# Altium PCB nRF53_Module.PcbDoc
Units mil, origin at the board's own origin, x right, y up, seen from the top; angles counter-clockwise.
Board outline 550 x 880 mil, 3 copper layers (Top Layer, Mid-Layer 3, Bottom Layer); 34 components, 74 nets, 222 pads, 55 vias.
Unrouted connection lines stored in the file: 48.
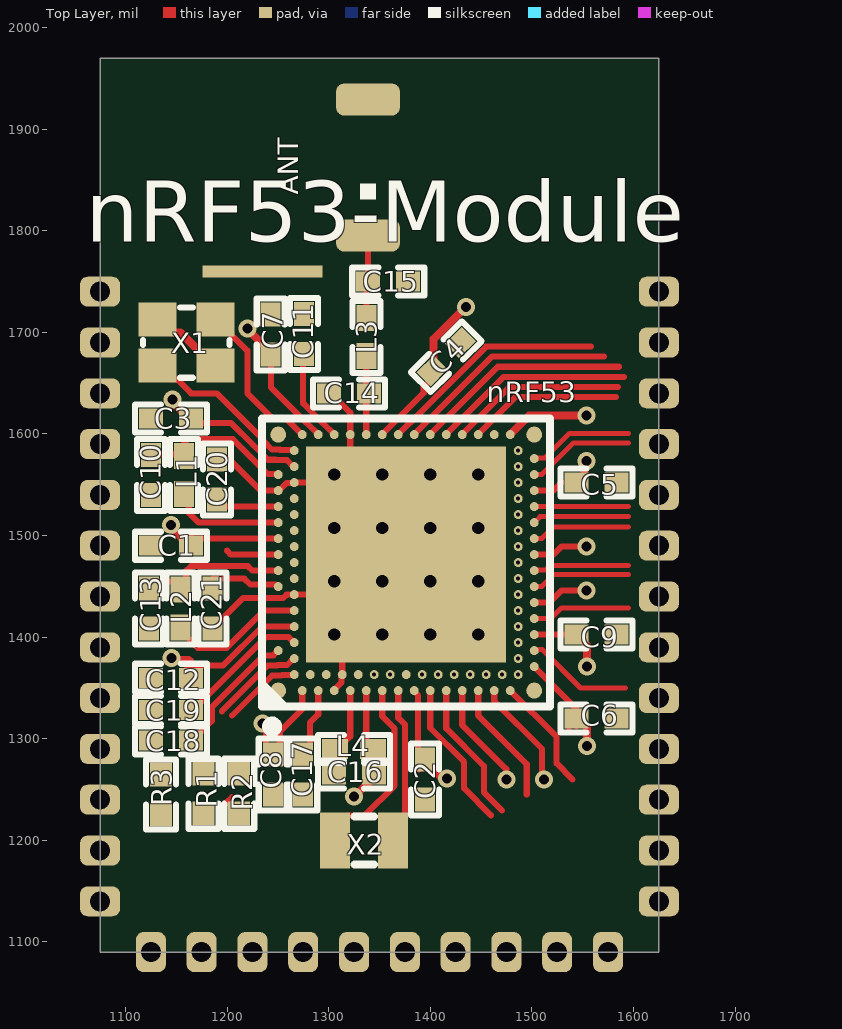
[diagram p0: Top Layer view]
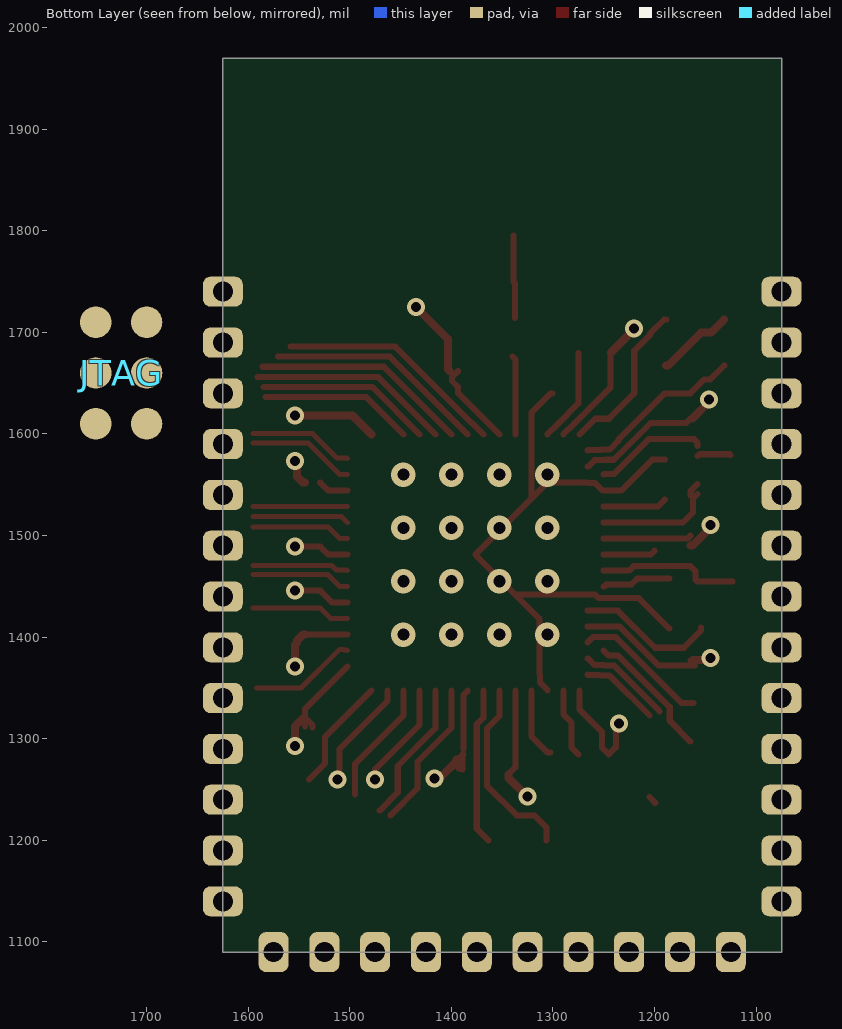
[diagram p1: Bottom Layer view, seen from below]
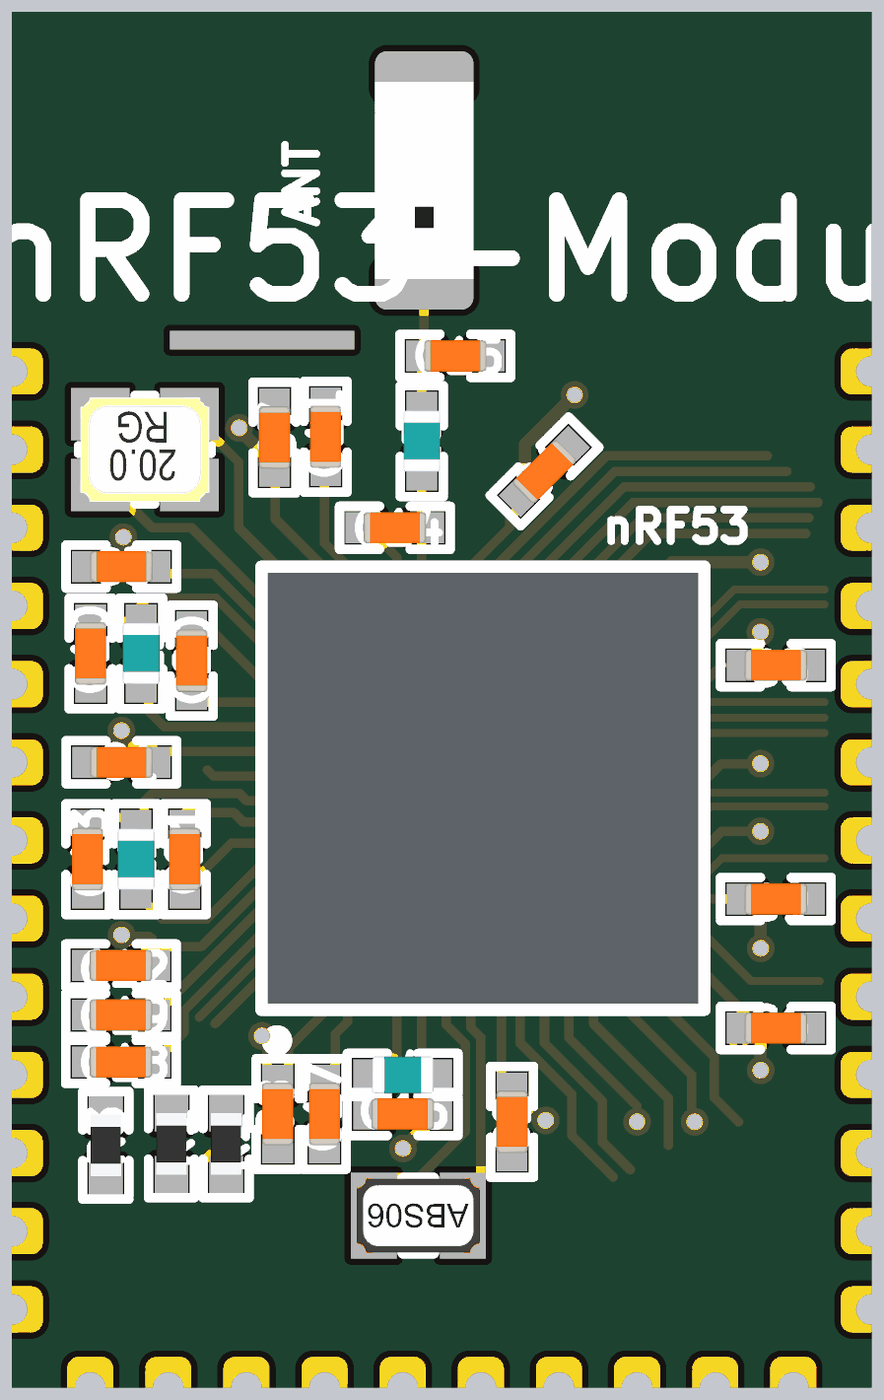
[diagram p2: 3D render of the assembled board from above, using the file's embedded part models]

## Layer stack, top to bottom
Top Solder: solder mask 0.4, Solder Resist, Dk 3.5
Top Layer: signal copper 1.4
Dielectric 1: dielectric 12.6, FR-4, Dk 4.8
Mid-Layer 3: signal copper 1.4
Dielectric2: dielectric 12.6, FR-4, Dk 4.8
Bottom Layer: signal copper 1.4
Bottom Solder: solder mask 0.4, Solder Resist, Dk 3.5

## Board outline
1075,1090 1625,1090 1625,1970 1075,1970

## Design rules (kind name [scope] priority, off if disabled: settings)
Clearance [All] p1: gap=3.94 ignorepadtopadclearanceinfootprint=TRUE
ComponentClearance [All] p1 off: gap=10 collisioncheckmode=3 verticalgap=10 showdistances=FALSE
DiffPairsRouting [InDifferentialPair('DiffPair')] p1: maxlimit=10 minlimit=3.5 mostfreqgap=7.87 toplayer_minwidth=3.5 toplayer_maxwidth=15 toplayer_prefwidth=5.91 midlayer3_minwidth=3.5 midlayer3_maxwidth=15 midlayer3_prefwidth=5.91 bottomlayer_minwidth=3.5 bottomlayer_maxwidth=15 bottomlayer_prefwidth=5.91 maxuncoupledlength=500
HoleSize [All] p1 off: absolutevalues=TRUE maxlimit=100 minlimit=1 maxpercent=80.000 minpercent=20.000
HoleToHoleClearance [All] p1 off: gap=11.81 allowstackedmicrovias=TRUE
MatchedLengths usb [InDifferentialPair('USB')] p1: tolerance=39.37 checknetsindiffpair=FALSE checkdiffpairvsdiffpair=TRUE checkxsignals=TRUE checkothers=TRUE
MinimumAnnularRing [IsVia] p1: minimumring=3
MinimumSolderMaskSliver [All] p1 off: minsoldermaskwidth=10
PlaneConnect [InNet('NetC11_2')] p1: planeconnectstyle=Direct reliefexpansion=20 reliefentries=4 reliefconductorwidth=10 reliefairgap=10
PolygonConnect [All] p1: thpad.connectstyle=Relief thpad.reliefconductorwidth=10 thpad.reliefentries=4 thpad.polygonreliefangle="90 Angle" thpad.airgapwidth=10 smdpad.connectstyle=Relief smdpad.reliefconductorwidth=10 smdpad.reliefentries=4 smdpad.polygonreliefangle="90 Angle" smdpad.airgapwidth=10 via.connectstyle=Direct via.reliefconductorwidth=10 via.reliefentries=4 via.polygonreliefangle="90 Angle" via.airgapwidth=10
PolygonConnect 3V3MCU [InNet('NetC11_2')] p2: connectstyle=Direct reliefconductorwidth=10 reliefentries=4 polygonreliefangle="90 Angle" airgapwidth=10
PolygonConnect VBUSMCU [InNet('NetC12_2')] p3: connectstyle=Direct reliefconductorwidth=10 reliefentries=4 polygonreliefangle="90 Angle" airgapwidth=10
PolygonConnect VUSB [InNet('VUSB')] p4: connectstyle=Direct reliefconductorwidth=0 reliefentries=4 polygonreliefangle="90 Angle" airgapwidth=0
PolygonConnect viagnd [InNet('GND')] p5: thpad.connectstyle=Relief thpad.reliefconductorwidth=10 thpad.reliefentries=4 thpad.polygonreliefangle="90 Angle" thpad.airgapwidth=10 smdpad.connectstyle=Relief smdpad.reliefconductorwidth=10 smdpad.reliefentries=4 smdpad.polygonreliefangle="90 Angle" smdpad.airgapwidth=10 via.connectstyle=Direct via.reliefconductorwidth=10 via.reliefentries=4 via.polygonreliefangle="90 Angle" via.airgapwidth=10
RoutingVias [All] p1: holewidth=7.87 width=15.75 viastyle="Through Hole" minholewidth=3.94 minwidth=7.87 maxholewidth=248.03 maxwidth=50
SilkToSilkClearance [All] p1 off: silktosilkclearance=10
SilkToSolderMaskClearance [IsPad] p1 off: minsilkscreentomaskgap=10 clearancetoexposedcopper=TRUE
SolderMaskExpansion [All] p1: expansion=4 istentingtop=FALSE
Width [All] p1: maxlimit=39.37 minlimit=3.2 preferedwidth=5.91
22 further rules are at their usual default settings.

## Components (designator, comment, footprint, x,y, rotation, side; value= is the part's Value field where it differs from the comment)
ANT "2450AT18D0100" AMCA31-2R450G-S1F-T3 1338.76,1795.28 r0 top
C1 "1uF" C0402 1145,1490 r0 top value=100pF
C2 "100nF" C0402 1395,1260 r90 top value=100pF
C3 "100nF" C0402 1144.99,1615.19 r0 top value=100pF
C4 "100nF" C0402 1415.75,1676.07 r225 top value=100pF
C5 "100nF" C0402 1563.82,1552.11 r180 top value=100pF
C6 "100nF" C0402 1563.82,1320 r180 top value=100pF
C7 "100nF" C0402 1242.99,1697.78 r270 top value=100pF
C8 "100nF" C0402 1245,1265 r90 top value=100pF
C9 "100nF" C0402 1563.82,1402.51 r180 top value=100pF
C10 "1uF" C0402 1125.31,1559.62 r90 top value=100pF
C11 "2.2nF" C0402 1275.66,1698.23 r270 top value=100pF
C12 "1uF" C0402 1144.68,1360 r0 top value=100pF
C13 "1uF" C0402 1123.22,1428.02 r90 top value=100pF
C14 "1.5pF" C0402 1320,1640 r0 top value=100pF
C15 "DNP" C0402 1358.66,1750 r180 top value=100pF
C16 "2.2uF" C0402 1325,1265 r0 top value=100pF
C17 "4.7uF" C0402 1275,1265 r90 top value=100pF
C18 "4.7uF" C0402 1144.68,1298.29 r0 top value=100pF
C19 "4.7uF" C0402 1144.68,1328.29 r0 top value=100pF
C20 "100nF" C0402 1190,1555 r270 top value=100pF
C21 "1uF" C0402 1185.51,1428.02 r90 top value=100pF
JTAG "DNP" "JTAG Pins 6" 1725,1710 r90 bottom value="Pin Header 2x5, 1.27mm"
L1 "10uH" IND0402 1157.59,1559.62 r270 top value=120R/0.55A
L2 "10uH" IND0402 1154.37,1428.01 r270 top value=120R/0.55A
L3 "3.9nH" IND0402 1337.22,1695.44 r270 top value=120R/0.55A
L4 "10uH" IND0402 1325,1290 r0 top value=120R/0.55A
nRF53 "nRF5340-QKAA" nRF5340 1376.38,1473.37 r90 top locked
nRF53-Module "DNP" nRF53Module 1075,1240 r0 top locked
R1 "22R" RES0402 1177,1245.89 r270 top value=0R
R2 "22R" RES0402 1212,1245.89 r270 top value=0R
R3 "4R7" RES0402 1135,1245 r270 top value=0R
X1 "32MHz" XTAL_2016 1160,1690 r180 top
X2 "32.768kHz" XTAL_2012 1335,1200 r180 top

## Footprints (in the part's own frame and the unit in brackets; to place one, negate y for a bottom-side part, rotate by r counter-clockwise, add the part's x,y. Pads: shape width x height; smd on the part's side, far side on the other; paste and mask are expansions set on the pad)
AMCA31-2R450G-S1F-T3 [mm] "Chip antenna 2.45Ghz"
  rrect50% 1.6x0.8 smd: 1(0,0) NC(0,3.4)
  silkscreen extent -0.2,0.9 0.2,1.3, body extent -0.8,0.1 0.8,3.3, height 1.4
C0402 [mm]
  rect 0.6x0.5 smd: 1(-0.5,0) 2(0.5,0)
  silkscreen extent -0.9,-0.35 0.9,0.35, body extent -0.51,-0.25 0.51,0.25, height 0.5
IND0402 [mm]
  rect 0.65x0.5 smd: 1(-0.475,0) 2(0.475,0)
  silkscreen extent -0.9,-0.35 0.9,0.35, body extent -0.5,-0.3 0.5,0.3, height 0.5
"JTAG Pins 6" [mil] "TC2030-ALT-NL"
  round 31 smd paste-196.85: 1(-100,-25) 2(-100,25) 3(-50,-25) 4(-50,25) 5(0,-25) 6(0,25)
  Top Layer pour cut-out: -100,25 -100,-25 0,-25 0,25
nRF53Module [mm] "Module"
  rrect50% 1x0.75 hole 0.5: 1(0,12.7) 2(0,11.43) 3(0,10.16) 4(0,8.89) 5(0,7.62) 6(0,6.35) 7(0,5.08) 8(0,3.81) 9(0,2.54) 10(0,1.27) 11(0,0) 12(0,-1.27) 13(0,-2.54) 14(13.97,-2.54) 15(13.97,-1.27) 16(13.97,0) 17(13.97,1.27) 18(13.97,2.54) 19(13.97,3.81) 20(13.97,5.08) 21(13.97,6.35) 22(13.97,7.62) 23(13.97,8.89) 24(13.97,10.16) 25(13.97,11.43) 26(13.97,12.7)
  rrect50% 0.75x1 hole 0.5: 27(1.27,-3.81) 28(2.54,-3.81) 29(3.81,-3.81) 30(5.08,-3.81) 31(6.35,-3.81) 32(7.62,-3.81) 33(8.89,-3.81) 34(10.16,-3.81) 35(11.43,-3.81) 36(12.7,-3.81)
nRF5340 [mm] "Nordic Semiconductor"
  rect 5.4x5 smd paste-5 mask+0.05: 104(0.2,0)
  round 0.4 smd paste+0.012 mask+0.05: A1(-3.2,3.2) A31(3.2,3.2) AL1(-3.2,-3.2) AL31(3.2,-3.2)
  round 0.225 smd paste+0.012 mask+0.05: A5(-2.2,3.2) A13(-0.6,3.2) A15(-0.2,3.2) A17(0.2,3.2) A19(0.6,3.2) A21(1,3.2) A23(1.4,3.2) A25(1.8,3.2) A27(2.2,3.2) AA1(-3.2,-1) AA31(3.2,-1) AB2(-2.8,-1.2) AC1(-3.2,-1.4) AC31(3.2,-1.4) AD2(-2.8,-1.6) AE1(-3.2,-1.8) AE31(3.2,-1.8) AF2(-2.8,-2) AG1(-3.2,-2.2) AG31(3.2,-2.2) AH2(-2.8,-2.4) AJ1(-3.2,-2.6) AJ31(3.2,-2.6) AK2(-2.8,-2.8) AK4(-2.4,-2.8) AK6(-2,-2.8) AK8(-1.6,-2.8) AK10(-1.2,-2.8) AK12(-0.8,-2.8) AK14(-0.4,-2.8) AK16(0,-2.8) AK18(0.4,-2.8) AK20(0.8,-2.8) AK22(1.2,-2.8) AK24(1.6,-2.8) AK26(2,-2.8) AK28(2.4,-2.8) AK30(2.8,-2.8) AL3(-2.6,-3.2) AL5(-2.2,-3.2) AL7(-1.8,-3.2) AL9(-1.4,-3.2) AL11(-1,-3.2) AL13(-0.6,-3.2) AL15(-0.2,-3.2) AL17(0.2,-3.2) AL19(0.6,-3.2) AL21(1,-3.2) AL23(1.4,-3.2) AL25(1.8,-3.2) AL27(2.2,-3.2) AL29(2.6,-3.2) B2(-2.8,2.8) B4(-2.4,2.8) B6(-2,2.8) B8(-1.6,2.8) B10(-1.2,2.8) B12(-0.8,2.8) B14(-0.4,2.8) B16(0,2.8) B18(0.4,2.8) B20(0.8,2.8) B22(1.2,2.8) B24(1.6,2.8) B26(2,2.8) B28(2.4,2.8) B30(2.8,2.8) C1(-3.2,2.6) C31(3.2,2.6) D2(-2.8,2.4) E1(-3.2,2.2) E31(3.2,2.2) F2(-2.8,2) G1(-3.2,1.8) G31(3.2,1.8) H2(-2.8,1.6) J1(-3.2,1.4) J31(3.2,1.4) K2(-2.8,1.2) L1(-3.2,1) L31(3.2,1) M2(-2.8,0.8) N1(-3.2,0.6) N31(3.2,0.6) P2(-2.8,0.4) R1(-3.2,0.2) R31(3.2,0.2) T2(-2.8,0) U1(-3.2,-0.2) U31(3.2,-0.2) V2(-2.8,-0.4) W1(-3.2,-0.6) W31(3.2,-0.6) Y2(-2.8,-0.8)
  rrect50% 1.1x1 on Top Paste: ""(-1.75,-1.8) ""(-1.75,-0.6) ""(-1.75,0.6) ""(-1.75,1.8) ""(-0.45,1.8) ""(-0.45,-0.6) ""(-0.45,0.6) ""(-0.45,-1.8) ""(0.85,1.8) ""(0.85,-0.6) ""(0.85,0.6) ""(0.85,-1.8) ""(2.15,-1.8) ""(2.15,-0.6) ""(2.15,0.6) ""(2.15,1.8)
  silkscreen extent -4.22,-3.6 3.6,3.6, body extent -3.5,-3.5 3.5,3.5, height 0.85
RES0402 [mm]
  rect 0.6x0.55 smd: 1(-0.5,0) 2(0.5,0)
  silkscreen extent -0.87,-0.38 0.88,0.38, body extent -0.5,-0.25 0.5,0.25, height 0.3
XTAL_2012 [mm]
  rect 0.75x1.4 smd: 1(-0.725,0) 2(0.725,0)
  silkscreen extent -0.24,-0.6 0.24,0.6, body extent -1,-0.61 1,0.61, height 0.6
XTAL_2016 [mm]
  rect 0.95x0.85 smd: 1(-0.725,-0.575) 2(0.725,-0.575) 3(0.725,0.575) 4(-0.725,0.575)
  silkscreen extent -1.08,-0.88 1.08,0.88, body extent -1.05,-0.85 1.05,0.85, height 0.56

## Part data
ANT: "2.45 GHz chip antenna", Manufacturer="Johanson Technology", Part Number="Johanson 2450AT18D0100_STD-L", Part number IPS=N.A., Supplier Part Number 1=2450AT18D0100E, Artikkelnr Noca=53059035, ComponentLink1Description=Datasheet, ComponentLink2Description="Supplier link", Footprint Doc=2450AT18D0100, HelpURL=http://www.johansontechnology.com/datasheets/antennas/2450AT18D0100.pdf, LatestRevisionDate=2016-06-02, Manufacturer Part Number=2450AT18D0100, Pin Count=4, Published=2016-01-12, Publisher="Nordic Semiconductor", Supplier 1=Digi-Key, Supplier 2=Mouser, Supplier Part Number 2=609-2450AT18D0100E
C1 C2 C3 C4 C5 C6 C7 C8 C9 C10 C11 C12 C13 C14 C15 C16 C17 C18 C19 C20 C21: library part CAP, "Capacitor", Published=8-Jun-2000, Publisher="Altium Limited", Revision="July-2002: Re-released for DXP Platform."
JTAG: "Pin Header 2x5, 1.27mm (50mil), SMD, Keying Shroud", Manufacturer=W-CON, Manufacturer Part Number=3132-10MS0BK00R1, Part Number="Pin Header 2x5 SMD, 1.27mm, KS", Part number IPS=N.A., Artikkelnr Noca=55010009, ComponentLink1Description=Datasheet, ComponentLink2Description="Supplier link", Footprint Doc=HDR_2x5-SMD-1.27mm, HelpURL=\\hizz\pro\app9717\Datasheet\connectores\W-CON\3132-XXMXXBK00XX.pdf, LatestRevisionDate=2016-04-21, Pin Count=10, Published=2016-01-22, Publisher="Nordic Semiconductor", Supplier 1=Cabcon, Supplier 2=Samtec, Supplier Part Number 1=3132-10MS0BK00R1, Supplier Part Number 2=FTSH-105-01-F-DV-K
L1 L2 L3 L4: "Inductor", Manufacturer=Murata, Manufacturer Part Number=BLM15AG121SN1D, Part Number=FB0402-120R@100M-500mA, Part number IPS=N.A., Artikkelnr Noca=33029317, ComponentLink1Description=Datasheet, ComponentLink2Description="Supplier link", Footprint Doc=0402, HelpURL=http://search.murata.co.jp/Ceramy/image/img/PDF/ENG/L0110S0100BLM15A_SN.pdf, LatestRevisionDate=2014-01-10, Note="Chip EMIFIL Inductor Type Chip Ferrite Bead", Pin Count=2, Published=2011-11-14, Publisher="Nordic Semiconductor"
nRF53: "Multi-protocol Bluetooth Low Energy, IEEE 802.15.4, ANT and 2.4GHz proprietary system-on-chip", Manufacturer="Nordic Semiconductor", Part Number=nRF5340-QKAADA, Part number IPS=N.A., Artikkelnr Noca=N.A., ComponentLink1Description=Datasheet, ComponentLink2Description="Supplier link", Footprint Doc=AQFN-98, LatestRevisionDate=2019-03-28, Pin Count=98, Published=2017-01-09, Publisher="Nordic Semiconductor", Supplier 1="Nordic Semiconductor", Supplier Part Number 1=nRF5340-QKAADA
nRF53-Module: library part nRF53-Module
R1 R2 R3: "Resistor, ±5%, 0.05W", Part Number=R0201-0R, Part number IPS=00000003245, Artikkelnr Noca=N.A., ComponentLink1Description=Datasheet, ComponentLink2Description="Supplier link", Footprint Doc=0201, LatestRevisionDate=2017-11-09, Note="Chip Res 5%", Pin Count=2, Published=2014-11-13, Publisher="Nordic Semiconductor"
X1: "XTAL SMD 2016, 32MHz, Cl=8pF, Total Tol: ±40ppm", Part Number=XTAL_SMD2016_32MHz_8pF_General, Footprint Doc=XTAL_2016, LatestRevisionDate=2016-08-19, Pin Count=4, Published=2016-08-19, Publisher="Nordic Semiconductor"
X2: "XTAL SMD 32.768kHz, 9pF, ±20ppm", Manufacturer=NDK, Manufacturer Part Number=NX3215SA-32.768K-STD-MUA-9, Part Number=XTAL_SMD3215_32.768kHz_9pF_NDK, Part number IPS=N.A., Supplier Part Number 1=535-11937-6-ND, Artikkelnr Noca=22010049, ComponentLink1Description=Datasheet, ComponentLink2Description="Supplier link", Footprint Doc=XTAL_3215, LatestRevisionDate=2017-10-23, Note="XTAL SMD 32.768kHz", Pin Count=2, Published=2017-10-23, Publisher="Nordic Semiconductor", Supplier 1=Digi-Key

## Free pads (board coordinates)
  rect 118.11x11.81 smd: 1(1235,1760)

## Via types
v1: diameter 7.87, hole 3.94, Top Layer to Mid-Layer 3, tented both sides, 23 vias
v2: diameter 17.72, hole 9.84, Top Layer to Bottom Layer, tented both sides, 16 vias
v3: diameter 24, hole 12, Top Layer to Bottom Layer, tented both sides, 16 vias

## Nets (pads, with @x,y where several pads share a name; then routed paths per layer and width w, separated by ;. In a path a pad name is that pad's centre, name@x,y a point inside that pad or via, vN(x,y) a via of type N, cw(c..) or ccw(c..) an arc to the next point about the centre after c; other vN are vias at no path point)
ADP_RST: nRF53.AK28
  other v1: 1486.61,1567.86
BUSY: nRF53.M2
  other v1: 1344.88,1363.14
D/C: nRF53.V2
  other v1: 1392.13,1363.14
D_RST: nRF53.P2
  other v1: 1360.63,1363.14
E_CS: nRF53.Y2
  other v1: 1407.87,1363.14
EPROM_CS: nRF53.AK14
  other v1: 1486.61,1457.62
GND: C1.1 C2.1 C3.1 C4.1 C5.1 C6.1 C7.1 C8.1 C9.1 C10.1 C11.1 C12.1 C13.1 C14.1 C15.1 C16.1 C17.1 C18.1 C19.1 C20.1 C21.1 JTAG.3 nRF53-Module.30 nRF53.104 nRF53.A25 nRF53.B12 nRF53.B26 nRF53.G1 nRF53.H2 nRF53.J31 X1.2 X1.4 | length 749.5
  Top Layer w6: C21.1 1215.56,1438.38 1255.1,1438.38 1258.59,1441.88 nRF53.B12 nRF53.104@1337.01,1441.88 ; C20.1 1202.52,1574.68 1232.96,1544.24 nRF53.A25 1251.17,1544.24 1258.49,1551.57 1265.59,1551.57 nRF53.B26 1305.51,1552.11 nRF53.104@1321.26,1536.36 ; C14.1 1302.28,1640 1321.26,1621.02 nRF53.J31 nRF53.104@1321.26,1536.36 ; nRF53.G1 1305.51,1348.16 1312.84,1355.49 1312.84,1362.59 nRF53.H2 1313.39,1418.25 nRF53.104@1337.01,1441.88 ; nRF53.104@1321.26,1536.36 nRF53.104 nRF53.104@1337.01,1441.88
  Top Layer w7.87: X1.2 1144.25,1699.84 1154.09,1699.84 1186.57,1667.36 X1.4
  other v3: 1305.51,1402.51 1352.76,1402.51 1400,1402.51 1447.24,1402.51 1305.51,1455 1352.76,1455 1400,1455 1447.24,1455 1305.51,1507.49 1352.76,1507.49 1400,1507.49 1447.24,1507.49 1305.51,1559.99 1352.76,1559.99 1400,1559.99 1447.24,1559.99
INT2: nRF53.AK30
  other v1: 1486.61,1583.61
IPS_BACKLIGHT: nRF53.W1 | length 147.4
  Top Layer w6: nRF53.W1 1400,1310.58 1433.36,1277.22 1433.36,1251.09 1459.72,1224.72
IPS_CS: nRF53.AD2
  other v1: 1439.37,1363.14
LRCLK: nRF53.R31 | length 226
  Top Layer w6: nRF53.R31 1368.5,1599.68 1379.54,1610.72 1379.87,1610.72 1455.16,1686.01 1558.39,1686.01
Motor: nRF53.AA1 | length 140.8
  Top Layer w6: nRF53.AA1 1415.75,1310.2 1452.77,1273.18 1452.77,1247.23 1470.69,1229.31
NetANT_1: ANT.1 C15.2 L3.1 | length 81.9
  Top Layer w6: L3.1 1337.22,1748.25 C15.2 1338.76,1750.21 ANT.1
NetC10_2: C10.2 L1.1 nRF53.A27 | length 145.1
  Top Layer w6: C10.2 1126.01,1580 1155.91,1580 L1.1 ; L1.1@1157.59,1588.32 1157.59,1591.27 1161.32,1595 1205.7,1595 1240.16,1560.53 1249.85,1560.53 nRF53.A27
NetC11_2: C11.2 nRF53.G31 | length 93.1
  Top Layer w6: C11.2@1274.92,1679.71 1274.92,1630.19 1294.39,1610.72 1294.47,1610.72 1305.51,1599.68 nRF53.G31
NetC13_2: C13.2 L2.1 nRF53.A15 | length 140.3
  Top Layer w6: C13.2@1123.22,1454.61 1157.67,1454.61 1159.58,1456.51 1159.58,1464.87 1164.7,1470 1220.57,1470 1225.07,1465.5 nRF53.A15
NetC14_2: C14.2 L3.2 nRF53.L31 | length 78.2
  Top Layer w6: nRF53.L31 1337.01,1640 1337.01,1673.31 L3.2@1340,1676.3
NetC17_2: C17.2 nRF53.E1 | length 68.8
  Top Layer w6: C17.2 1281.84,1291.53 1281.84,1316.1 1289.76,1324.02 nRF53.E1
NetC18_2: C18.2 nRF53.A5 R3.1 | length 130.8
  Top Layer w6: C18.2@1164.68,1297.15 1185.06,1317.52 1185.06,1331.11 1236.03,1382.07 1245.45,1382.07 1250.13,1386.76 nRF53.A5
NetC19_2: C19.2 nRF53.B6 | length 133.5
  Top Layer w6: C19.2@1161.81,1335.14 1173.24,1335.14 1238.19,1400.09 1260.69,1400.09 nRF53.B6
NetC20_2: C20.2 nRF53.A23 | length 63.2
  Top Layer w6: C20.2 1196.82,1528.49 nRF53.A23
NetC21_2: C21.2 nRF53.A13 | length 68.2
  Top Layer w6: C21.2@1185.51,1457.7 1217.01,1457.7 1222.9,1451.81 1247.56,1451.81 1249.62,1449.75 nRF53.A13
NetL1_2: L1.2 nRF53.A21 | length 126.9
  Top Layer w6: L1.2 1162.36,1536.15 1162.36,1522.64 1172.26,1512.74 nRF53.A21 ; L1.2@1157.59,1550.92 1164.44,1544.07 L1.2@1164.44,1539.22
NetL2_2: L2.2 nRF53.B10 | length 136.8
  Top Layer w6: L2.2 1154.37,1406.36 1171.14,1389.59 1199.59,1389.59 1236.13,1426.13 nRF53.B10
NetL4_1: L4.1 nRF53.J1 | length 70.2
  Top Layer w6: L4.1@1302.56,1286.65 1305.51,1286.65 1321.26,1302.4 nRF53.J1
NetnRF53_B2: nRF53.B2 R2.1 | length 85.9
  Top Layer w6: 1199.3,1236.91 1204.94,1242.55 ; 1204.94,1322.88 1244.26,1362.2 1253.68,1362.2 1254.07,1362.59 1265.59,1362.59 nRF53.B2
NetnRF53_B4: nRF53.B4 R1.1 | length 92.6
  Top Layer w6: 1195,1326.99 1240.14,1372.14 1249.57,1372.14 1249.96,1372.53 1259.01,1372.53 1265.37,1378.88 nRF53.B4
NetnRF53_B30: nRF53.B30 X1.3 | length 170.1
  Top Layer w6: X1.3 1145.19,1653.63 1151.11,1653.63 1164.74,1640 1190,1640 1235.58,1594.42 1235.58,1593.22 1244.26,1584.55 1251.92,1584.55 1252.31,1584.16 1265.59,1584.16 nRF53.B30
NetnRF53_C31: nRF53.C31 X1.1 | length 157.7
  Top Layer w6: X1.1 1190.51,1712.64 1204.24,1698.91 1204.24,1697.69 1220,1681.93 1220,1640 1245,1615 1258.37,1615 nRF53.C31
NetnRF53_N1: nRF53.N1 X2.2 | length 187
  Top Layer w6: X2.2 1306.46,1212.8 1318.22,1224.56 1335.71,1224.56 1365,1253.85 1365,1310 1352.76,1322.24 nRF53.N1
NetnRF53_R1: nRF53.R1 X2.1 | length 154.8
  Top Layer w6: X2.1 1375,1211.46 1375,1314.05 1368.5,1320.55 nRF53.R1
P0.08: nRF53.AH2
  other v1: 1470.87,1363.14
P0.09: nRF53.AJ1 | length 112.8
  Top Layer w6: nRF53.AJ1 1524.32,1301.81 1524.32,1275.68 1540,1260
P0.10: nRF53.AK2
  other v1: 1486.61,1363.14
P0.12: nRF53.AK6
  other v1: 1486.61,1394.63
P0.19: nRF53.AL13 | length 97.5
  Top Layer w5: nRF53.AL13 1509.79,1449.75 1521.64,1461.6 1595,1461.6
P0.20: nRF53.AK16
  other v1: 1486.61,1473.37
P0.21: nRF53.AL15 | length 94.7
  Top Layer w5: nRF53.AL15 1503.1,1466.24 1513.64,1466.24 1517.94,1470.54 1595,1470.54
P0.22: nRF53.AK18
  other v1: 1486.61,1489.12
P0.23: nRF53.AK20
  other v1: 1486.61,1504.87
P0.24: nRF53.AL27 | length 105.5
  Top Layer w5: nRF53.AL27 1509.79,1559.99 1540.82,1591.01 1595,1591.01
P0.26: nRF53.AL29 | length 102.2
  Top Layer w5: nRF53.AL29 1502.91,1576.28 1512.03,1576.28 ; 1512.7,1576.24 1536.91,1600.45 1595,1600.45
P0.30: nRF53.B24
P0.31: nRF53.B22
P1.04: nRF53.AL19 | length 97.5
  Top Layer w5: nRF53.AL19 1509.79,1496.99 1521.41,1508.62 1595,1508.62
P1.05: nRF53.AK22
  other v1: 1486.61,1520.62
P1.06: nRF53.AL21 | length 95
  Top Layer w5: nRF53.AL21 1508.17,1518.55 1595,1518.55
P1.07: nRF53.AK24
  other v1: 1486.61,1536.36
P1.08: nRF53.AL23 | length 92.6
  Top Layer w5: nRF53.AL23 1595,1528.49
P1.09: nRF53.AK26
  other v1: 1486.61,1552.11
P1.11: nRF53.B20
P1.12: nRF53.B18
P1.13: nRF53.A17 | length 51.9
  Top Layer w6: 1200,1485 1203.75,1481.25 nRF53.A17
P1.14: nRF53.B16
P1.15: nRF53.B14
QSPI_DATA0: nRF53.AL5 | length 105.9
  Top Layer w5: nRF53.AL5 1503.1,1387.5 1505.83,1387.5 1506.37,1388.04 1509.9,1388.04 1547.94,1350 1591.95,1350
QSPI_DATA1: nRF53.AK8
  other v1: 1486.61,1410.38
QSPI_DATA2: nRF53.AK10
  other v1: 1486.61,1426.13
QSPI_DATA3: nRF53.AL9 | length 96.9
  Top Layer w5: nRF53.AL9 1518.7,1418.25 1529.03,1428.59 1595,1428.59
QSPI_SCK: nRF53.AK12
  other v1: 1486.61,1441.88
RESET: JTAG.5 nRF53.AC31 | length 173.1
  Top Layer w6: nRF53.AC31 1431.5,1599.68 1478.08,1646.26 1585,1646.26
SCK: nRF53.U31 | length 218.5
  Top Layer w6: nRF53.U31 1384.25,1599.68 1460.64,1676.07 1570.79,1676.07
SCL: nRF53.AF2
  other v1: 1455.12,1363.14
SCLK: nRF53.AB2
  other v1: 1423.62,1363.14
SDA: nRF53.AE1 | length 122.2
  Top Layer w5.98: nRF53.AE1 1447.24,1322.76 1495,1275 1495,1245
SDOUT: nRF53.AE31 | length 151.2
  Top Layer w6: nRF53.AE31 1447.24,1599.68 1483.89,1636.33 1582.96,1636.33
SWDCLK: JTAG.4 nRF53.W31 | length 213.6
  Top Layer w6: nRF53.W31 1400,1599.68 1466.45,1666.14 1585.76,1666.14
SWDIO: JTAG.2 nRF53.AA31 | length 198.7
  Top Layer w6: nRF53.AA31 1415.75,1599.68 1472.26,1656.2 1590.74,1656.2
SWO: JTAG.6 nRF53.AK4
  other v1: 1486.61,1378.88
USB_N: nRF53-Module.28 R1.2
USB_P: nRF53-Module.29 R2.2
VBAT: R3.2
VDD_nRF: C1.2 C2.2 C3.2 C4.2 C5.2 C6.2 C7.2 C8.2 C9.2 C12.2 C16.2 JTAG.1 L4.2 nRF53.A19 nRF53.AC1 nRF53.AG1 nRF53.AJ31 nRF53.AL3 nRF53.AL7 nRF53.AL11 nRF53.AL17 nRF53.AL25 nRF53.B8 nRF53.B28 nRF53.C1 nRF53.E31 nRF53.L1 nRF53.N31 nRF53.U1 | length 1697.6
  Top Layer w6: 1160.08,1372.16 1196.22,1372.16 1234.43,1410.38 nRF53.B8 ; 1162.7,1377.22 1164.67,1377.22 ; C1.2@1164.67,1499.78 1167.45,1496.99 nRF53.A19 ; C3.2 1169.14,1610.72 1204.03,1610.72 1225.65,1589.11 1240.14,1574.61 1247.8,1574.61 1248.19,1574.22 1259.01,1574.22 1265.37,1567.86 nRF53.B28 ; v2(1235,1315) 1235,1311.83 1238.16,1308.67 1238.16,1291.53 C8.2 1251.84,1291.53 1251.84,1306.84 1274.02,1329.02 nRF53.C1 ; C7.2 C7.2@1242.99,1680.07 ; C7.2@1243.43,1678.1 1243.43,1645.7 1278.4,1610.72 1278.72,1610.72 1289.76,1599.68 nRF53.E31 ; nRF53.L1 1337.01,1271.84 1343.85,1265 C16.2 ; nRF53.N31 1352.76,1599.68 1393.58,1640.5 1393.58,1646.33 1399.39,1652.14 1399.39,1655.91 C4.2@1393.58,1661.72 ; nRF53.U1 1384.25,1346.62 1388.16,1342.71 C2.2@1388.16,1289.56 ; C2.2@1388.16,1284.56 C2.2@1395,1277.72 ; C2.2@1389.02,1269.67 C2.2@1389.02,1284.56 ; C2.2@1389.02,1274.67 C2.2@1392.74,1270.94 ; nRF53.AC1 1431.5,1313.5 1475,1270 ; nRF53.AG1 1462.99,1337.01 1510,1290 1510,1261.85 v2(1511.85,1260) ; nRF53.AL3 1544.13,1329.24 C6.2 C6.2@1544.13,1311.99 ; nRF53.AL7 C9.2 ; nRF53.AL11 1517.18,1434 1529.03,1445.85 v2(1553.98,1445.85) ; nRF53.AL17 1521.16,1481.25 1529.03,1489.12 v2(1553.98,1489.12) ; nRF53.AL25 1521.16,1544.24 1529.03,1552.11 ; C6.2@1536.5,1311.19 1536.5,1313.16 1543.35,1320 C6.2@1545.31,1320
  Top Layer w7.87: v2(1145.01,1510.22) 1145.01,1507.7 1162.72,1490 C1.2 ; v2(1145.13,1379.57) 1146.98,1377.72 1162.2,1377.72 1162.7,1377.22 ; v2(1146.24,1634.01) 1146.24,1631.66 C3.2@1162.7,1615.19 ; v2(1220.37,1703.91) 1220.37,1702.69 C7.2@1242.99,1680.07 ; v2(1325.2,1242.96) 1343.7,1261.45 C16.2@1343.7,1265 ; C2.2 1395,1277.72 1409.91,1262.81 1414.62,1262.81 v2(1416.5,1260.92) ; C4.2 1403.22,1663.55 1403.22,1693.22 v2(1435,1725) ; nRF53.AJ31 1497.4,1618.02 v2(1553.98,1618.02) ; C9.2 1546.1,1402.51 1552.01,1396.6 1552.01,1394.63 1554.13,1392.51 v2(1554.13,1371.01) ; C5.2 1546.1,1552.11 1552.01,1558.02 1552.01,1568.77 1553.98,1570.74 v2(1553.98,1573.4) ; C6.2@1545.31,1320 1546.1,1320 1554.13,1311.97 v2(1554.13,1293.01)
  other v2: 1475,1260
VIN: nRF53-Module.27
pads on no net: ANT.NC nRF53-Module.1 nRF53-Module.2 nRF53-Module.3 nRF53-Module.4 nRF53-Module.5 nRF53-Module.6 nRF53-Module.7 nRF53-Module.8 nRF53-Module.9 nRF53-Module.10 nRF53-Module.11 nRF53-Module.12 nRF53-Module.13 nRF53-Module.14 nRF53-Module.15 nRF53-Module.16 nRF53-Module.17 nRF53-Module.18 nRF53-Module.19 nRF53-Module.20 nRF53-Module.21 nRF53-Module.22 nRF53-Module.23 nRF53-Module.24 nRF53-Module.25 nRF53-Module.26 nRF53-Module.31 nRF53-Module.32 nRF53-Module.33 nRF53-Module.34 nRF53-Module.35 nRF53-Module.36 nRF53. nRF53.A1 nRF53.A31 nRF53.AG31 nRF53.AL1 nRF53.AL31 nRF53.D2 nRF53.F2 nRF53.K2 nRF53.T2

## Text inside footprints (layer, text, board x,y; h text height)
nRF53: Mechanical 5 "AG1" at 1464.57,1333.97 h20 r90; Mechanical 5 "AJ1" at 1480.31,1333.97 h20 r90; Mechanical 5 "AH2" at 1472.44,1347.07 h20 r90; Mechanical 5 "AK4" at 1496.04,1374.62 h20 r90; Mechanical 5 "AL5" at 1511.78,1382.24 h20 r90; Mechanical 5 "AK2" at 1495.02,1358.87 h20 r90; Mechanical 5 "AL3" at 1511.79,1366.49 h20 r90; Mechanical 5 "V2" at 1393.7,1350.22 h20 r90; Mechanical 5 "U1" at 1385.83,1336.81 h20 r90; Mechanical 5 "Y2" at 1409.45,1350.22 h20 r90; Mechanical 5 "AA1" at 1417.32,1334.23 h20 r90; Mechanical 5 "W1" at 1401.57,1336.81 h20 r90; Mechanical 5 "AD2" at 1440.94,1347.07 h20 r90; Mechanical 5 "AC1" at 1433.07,1333.97 h20 r90; Mechanical 5 "AE1" at 1448.82,1334.75 h20 r90; Mechanical 5 "AB2" at 1425.2,1347.07 h20 r90; Mechanical 5 "H2" at 1314.96,1350.22 h20 r90; Mechanical 5 "J1" at 1322.83,1336.81 h20 r90; Mechanical 5 "G1" at 1307.09,1336.81 h20 r90; Mechanical 5 "M2" at 1346.46,1350.22 h20 r90; Mechanical 5 "L1" at 1338.58,1336.03 h20 r90; Mechanical 5 "P2" at 1362.2,1350.22 h20 r90; Mechanical 5 "R1" at 1370.08,1337.32 h20 r90; Mechanical 5 "N1" at 1354.33,1337.58 h20 r90; Mechanical 5 "K2" at 1330.71,1350.22 h20 r90; Mechanical 5 "D2" at 1283.46,1350.22 h20 r90; Mechanical 5 "E1" at 1291.34,1337.58 h20 r90; Mechanical 5 "C1" at 1275.59,1336.81 h20 r90; Mechanical 5 "B4" at 1259.81,1376.17 h20 r90; Mechanical 5 "A5" at 1244.07,1383.92 h20 r90; Mechanical 5 "B2" at 1260.35,1361.04 h20 r90; Mechanical 5 "AK14" at 1496.04,1452.2 h20 r90; Mechanical 5 "AL13" at 1511.79,1444.07 h20 r90; Mechanical 5 "AK10" at 1496.06,1420.7 h20 r90; Mechanical 5 "AL11" at 1511.79,1428.32 h20 r90; Mechanical 5 "AK12" at 1496.04,1436.45 h20 r90; Mechanical 5 "AK8" at 1496.03,1406.12 h20 r90; Mechanical 5 "AL7" at 1511.78,1397.99 h20 r90; Mechanical 5 "AL9" at 1511.78,1412.57 h20 r90; Mechanical 5 "AL15" at 1511.78,1459.82 h20 r90; Mechanical 5 "B14" at 1259.81,1453.75 h20 r90; Mechanical 5 "A13" at 1244.09,1445.75 h20 r90; Mechanical 5 "B10" at 1259.81,1422.25 h20 r90; Mechanical 5 "B12" at 1259.81,1438 h20 r90; Mechanical 5 "B8" at 1259.81,1407.67 h20 r90; Mechanical 5 "A15" at 1244.07,1461.49 h20 r90; Mechanical 5 "AK24" at 1496.04,1530.94 h20 r90; Mechanical 5 "AL23" at 1511.79,1522.81 h20 r90; Mechanical 5 "AL25" at 1511.78,1538.56 h20 r90; Mechanical 5 "AK20" at 1496.06,1499.44 h20 r90; Mechanical 5 "AL21" at 1511.79,1507.06 h20 r90; Mechanical 5 "AK18" at 1496.03,1483.7 h20 r90; Mechanical 5 "AL17" at 1511.78,1475.56 h20 r90; Mechanical 5 "AL19" at 1511.78,1491.31 h20 r90; Mechanical 5 "AK22" at 1496.04,1515.19 h20 r90; Mechanical 5 "B24" at 1259.81,1532.49 h20 r90; Mechanical 5 "A23" at 1244.09,1524.49 h20 r90; Mechanical 5 "A25" at 1244.07,1540.23 h20 r90; Mechanical 5 "B20" at 1259.81,1500.99 h20 r90; Mechanical 5 "A21" at 1244.09,1508.74 h20 r90; Mechanical 5 "B18" at 1259.81,1485.24 h20 r90; Mechanical 5 "A17" at 1244.07,1477.24 h20 r90; Mechanical 5 "A19" at 1244.07,1492.99 h20 r90; Mechanical 5 "B22" at 1259.81,1516.74 h20 r90; Mechanical 5 "AL29" at 1511.78,1570.05 h20 r90; Mechanical 5 "AL27" at 1511.78,1554.3 h20 r90; Mechanical 5 "AK28" at 1496.03,1562.44 h20 r90; Mechanical 5 "AG31" at 1464.57,1604.17 h20 r90; Mechanical 5 "AJ31" at 1480.31,1604.17 h20 r90; Mechanical 5 "AK30" at 1496.04,1578.18 h20 r90; Mechanical 5 "U31" at 1385.83,1604.17 h20 r90; Mechanical 5 "AA31" at 1417.32,1604.17 h20 r90; Mechanical 5 "W31" at 1401.57,1604.17 h20 r90; Mechanical 5 "AC31" at 1433.07,1604.17 h20 r90; Mechanical 5 "AE31" at 1448.82,1604.17 h20 r90; Mechanical 5 "J31" at 1322.83,1604.17 h20 r90; Mechanical 5 "G31" at 1307.09,1604.17 h20 r90; Mechanical 5 "L31" at 1338.58,1604.17 h20 r90; Mechanical 5 "R31" at 1370.08,1604.17 h20 r90; Mechanical 5 "N31" at 1354.33,1604.17 h20 r90; Mechanical 5 "E31" at 1291.34,1604.17 h20 r90; Mechanical 5 "C31" at 1275.59,1604.17 h20 r90; Mechanical 5 "B30" at 1259.81,1579.73 h20 r90; Mechanical 5 "A27" at 1244.07,1555.98 h20 r90; Mechanical 5 "B28" at 1259.81,1563.98 h20 r90; Mechanical 5 "AF2" at 1456.69,1347.07 h20 r90; Mechanical 5 "F2" at 1299.21,1350.22 h20 r90; Mechanical 5 "T2" at 1377.95,1350.22 h20 r90; Mechanical 5 "AK6" at 1496.03,1390.37 h20 r90; Mechanical 5 "B6" at 1259.81,1391.92 h20 r90; Mechanical 5 "AK26" at 1496.03,1546.69 h20 r90; Mechanical 5 "AK16" at 1496.03,1467.95 h20 r90; Mechanical 5 "B26" at 1259.81,1548.24 h20 r90; Mechanical 5 "B16" at 1259.81,1469.5 h20 r90